# Altium PCB PCB1.PcbDoc
Units mm, origin at the board's own origin, x right, y up, seen from the top; angles counter-clockwise.
Board outline 100 x 80 mm, 2 copper layers (Top Layer, Bottom Layer); 65 components, 72 nets, 305 pads, 35 vias.
Unrouted connection lines stored in the file: 27.
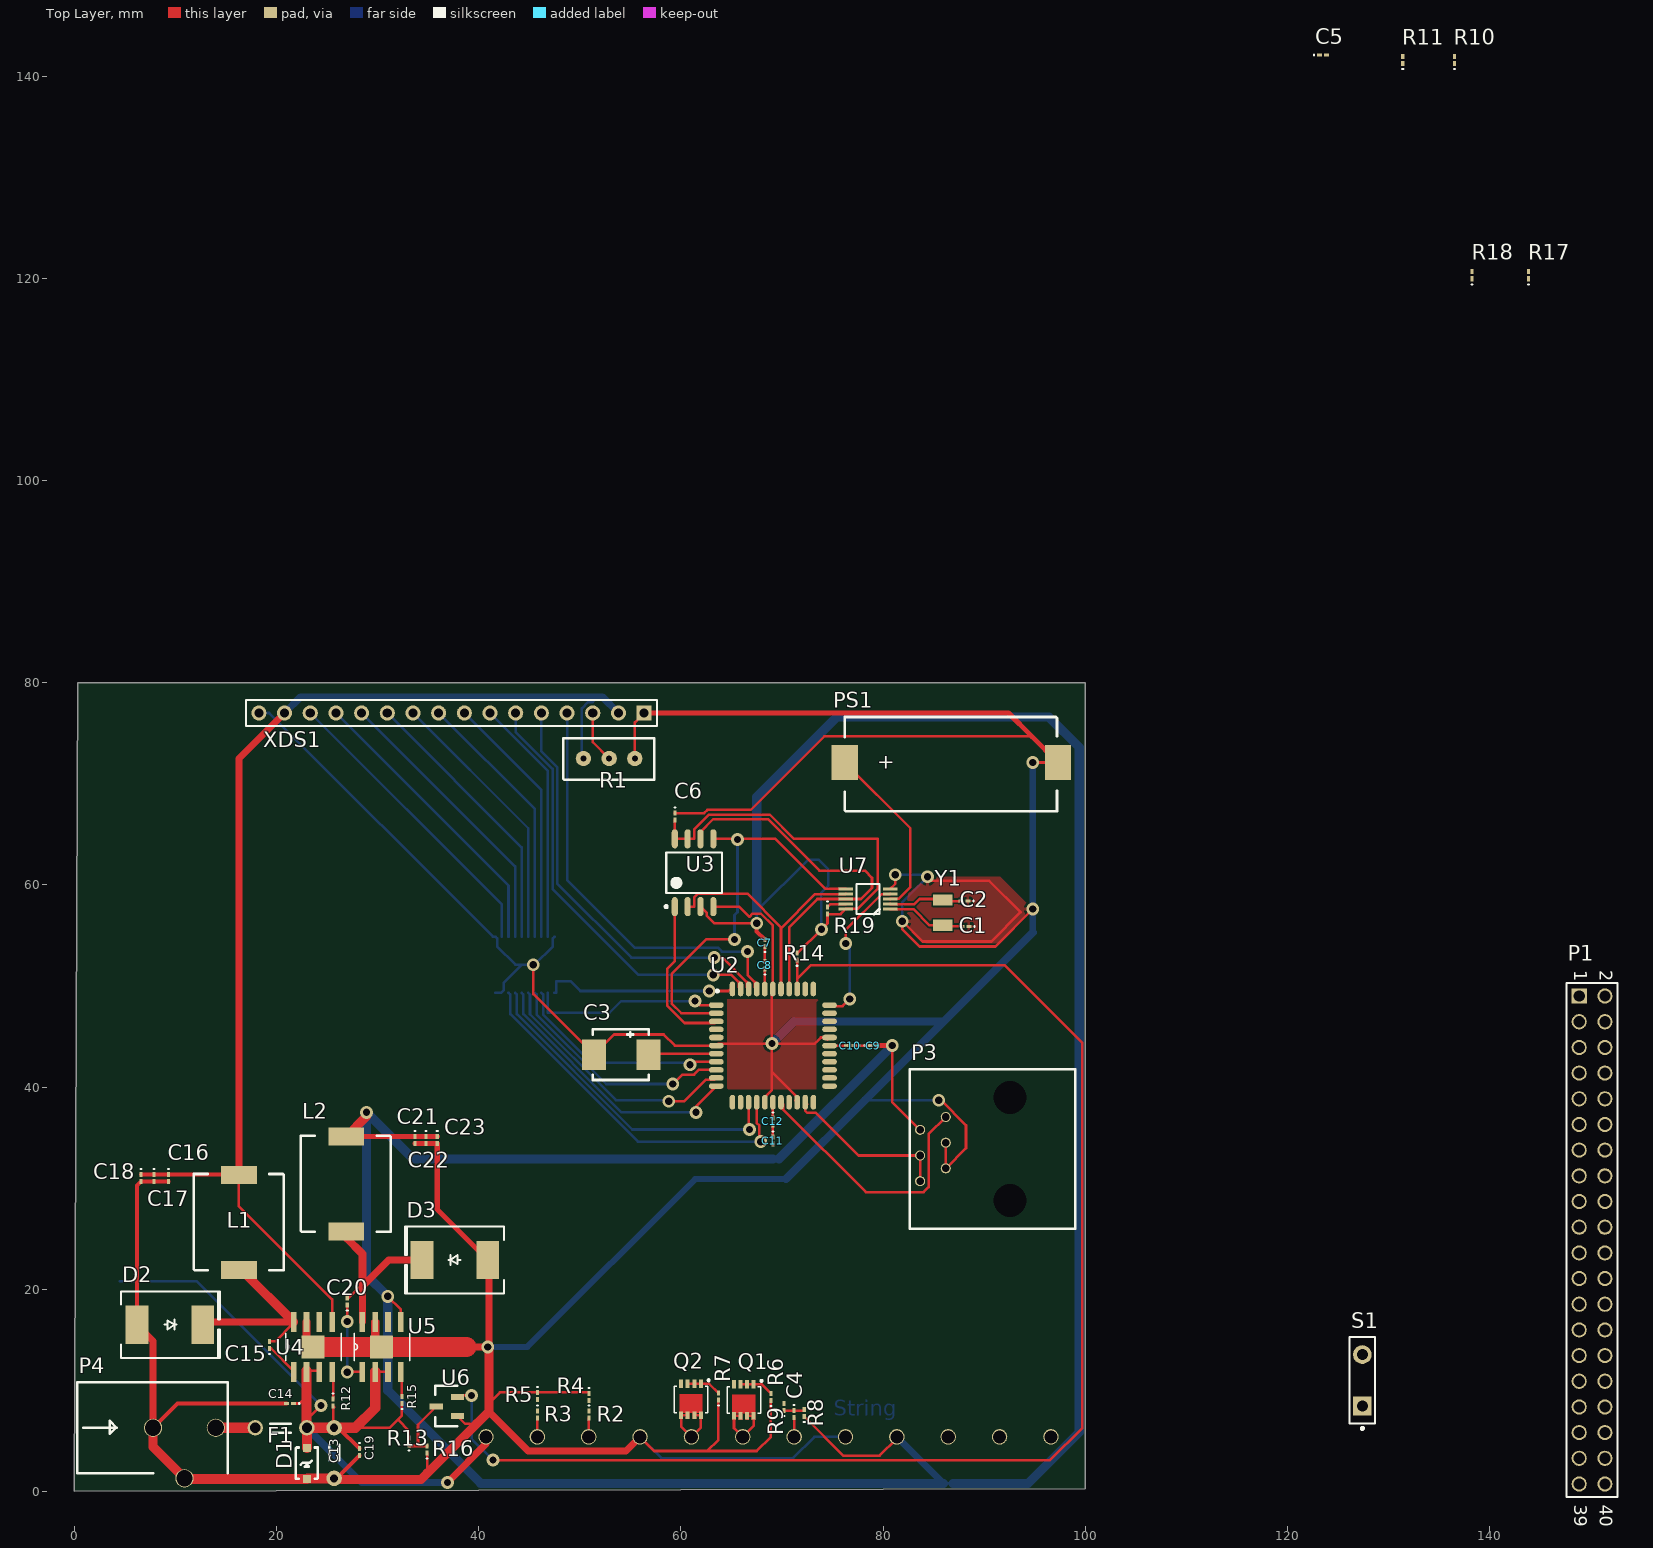
[diagram p0: Top Layer view]
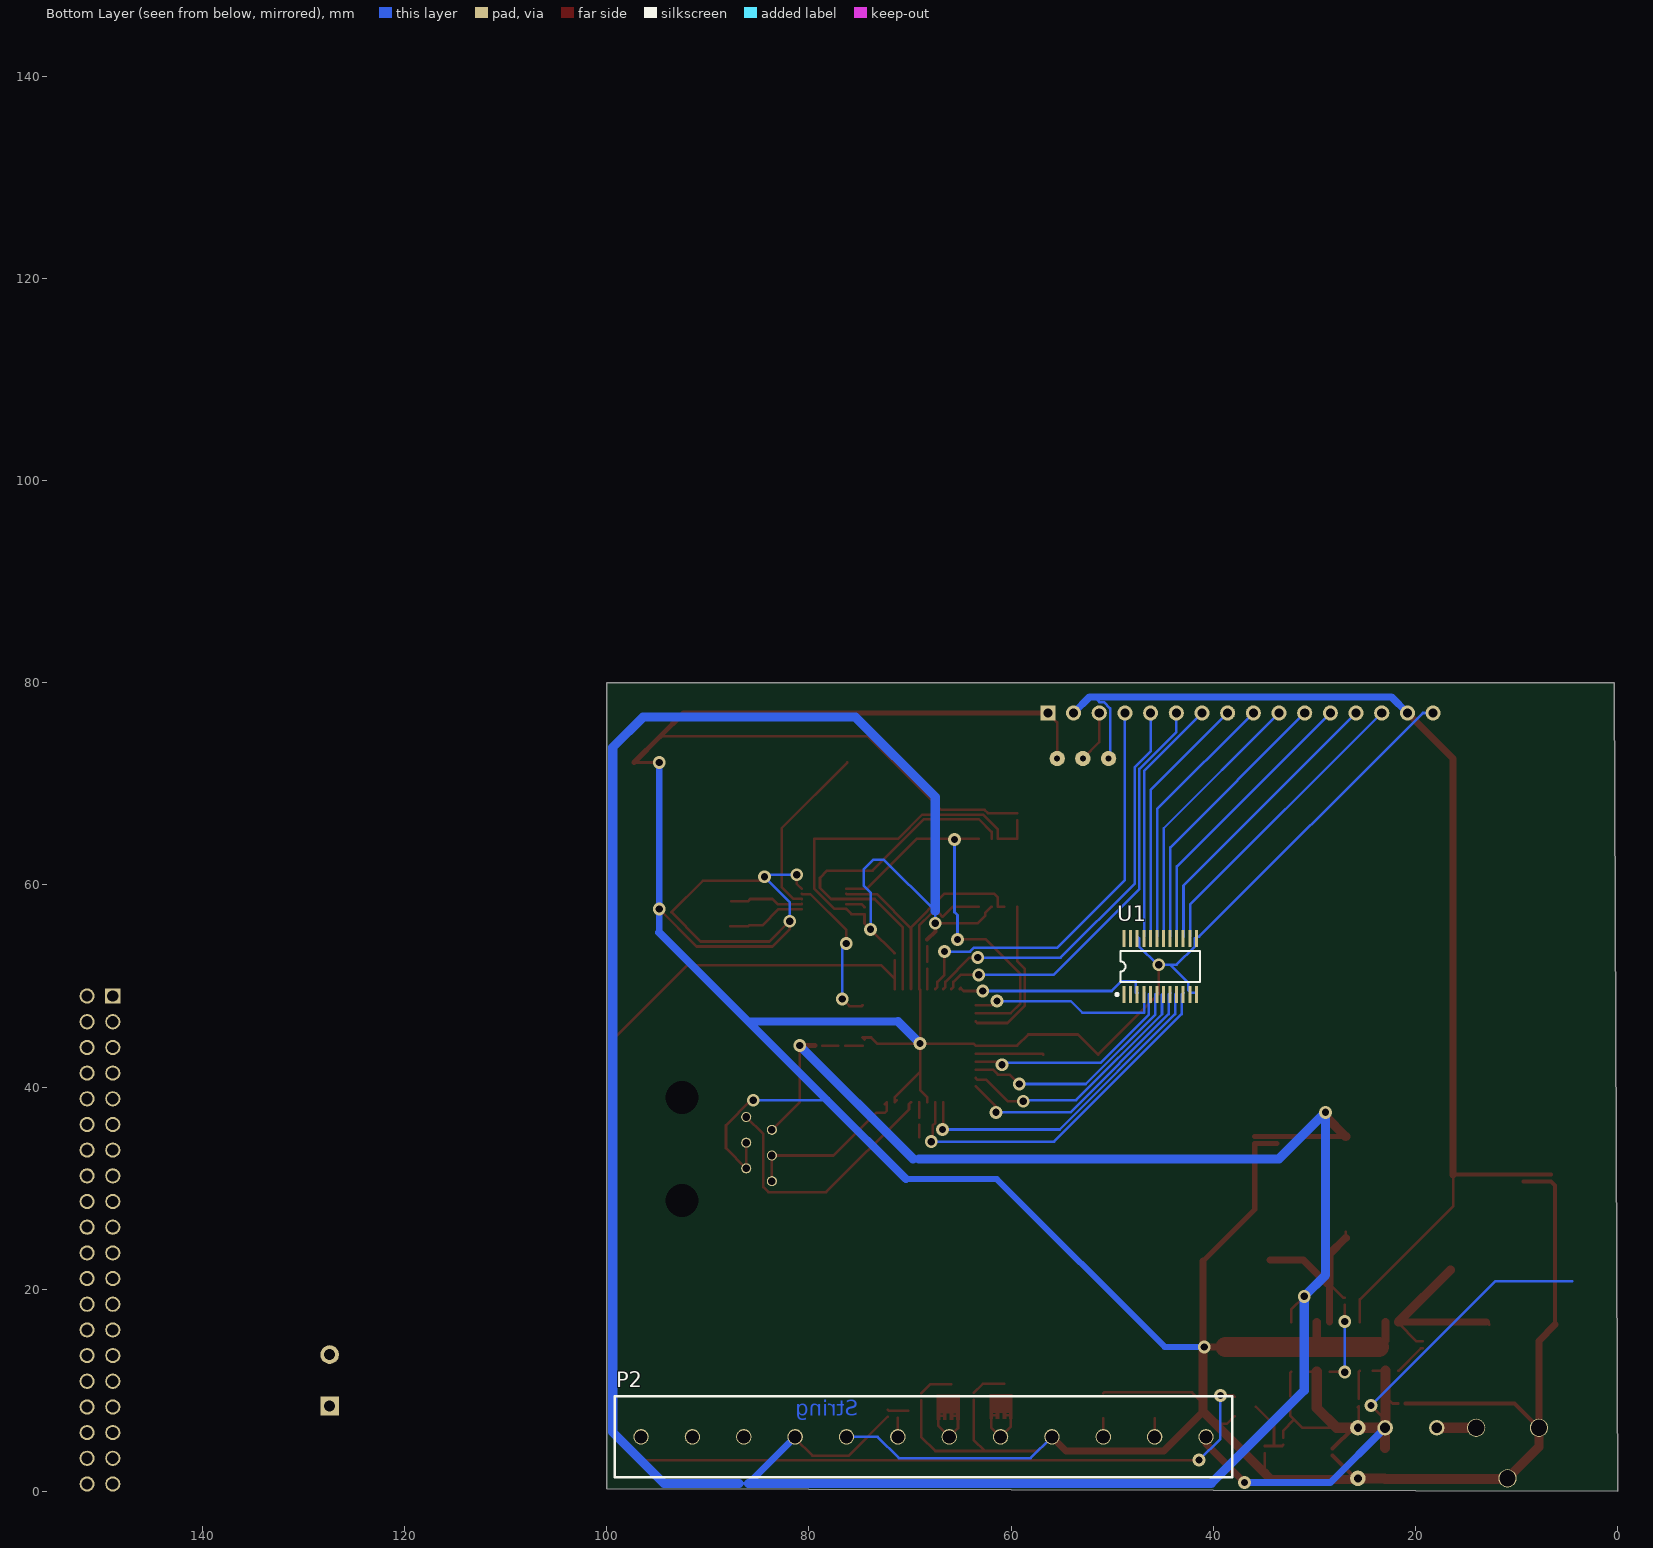
[diagram p1: Bottom Layer view, seen from below]

## Layer stack, top to bottom
Top Solder: solder mask 0.0102, Solder Resist, Dk 3.5
Top Layer: signal copper 0.0356
Dielectric 1: dielectric 0.32, FR-4, Dk 4.8
Bottom Layer: signal copper 0.0356
Bottom Solder: solder mask 0.0102, Solder Resist, Dk 3.5

## Board outline
0,0 100,0.262 100,80 0.338,80

## Design rules (kind name [scope] priority, off if disabled: settings)
Clearance [All] p1: gap=0.2 ignorepadtopadclearanceinfootprint=FALSE
HoleSize [All] p1: absolutevalues=TRUE maxlimit=5 minlimit=0.3 maxpercent=80.000 minpercent=20.000
PolygonConnect [All] p1: connectstyle=Relief reliefconductorwidth=0.254 reliefentries=4 polygonreliefangle="90 Angle" airgapwidth=0.254
RoomDefinition Ecran [InComponentClass('Ecran')] p1: confinementstyle=ConfineIn formatcopy=TRUE lockcomponents=FALSE outline 101.2,15.2 122.6,15.2 122.6,58.9 101.2,58.9
RoutingVias [All] p1: holewidth=0.711 width=1.27 viastyle="Through Hole" minholewidth=0.711 minwidth=1.27 maxholewidth=0.711 maxwidth=1.27
SilkToSolderMaskClearance [IsPad] p1: minsilkscreentomaskgap=0.2 clearancetoexposedcopper=TRUE
SolderMaskExpansion [All] p1: expansion=0.102
Width [All] p1: maxlimit=5 minlimit=0.2 preferedwidth=0.254
28 further rules are at their usual default settings.

## Classes and differential pairs
net class S_D[0..7]: S_D0 S_D1 S_D2 S_D3 S_D4 S_D5 S_D6 S_D7
net class RG_LED_[0..1]: RG_LED_0 RG_LED_1
component class Power: C7 C8 C9 C10 C11 C12 C13 C14 C15 C16 C17 C18 C19 C20 C21 C22 C23 D1 D2 D3 F1 L1 L2 P4 PS1 R12 R13 R14 R15 R16 U4 U5 U6
component class PIC: C1 C2 C3 C4 C5 C6 P3 R8 R9 R10 R11 R19 U2 U3 U7 Y1
component class OTHER: P1 Q1 Q2 R2 R3 R4 R5 R6 R7 R17 R18
component class Ecran: R1 U1 XDS1
component class Designator: * B1 D4 DS1 MCL039PURGW P5 S1

## Components (designator, comment, footprint, x,y, rotation, side; value= is the part's Value field where it differs from the comment)
C1 "18pF" 0603 88.15,55.9 r180 top
C2 "18pF" 0603 88.05,58.4 r180 top
C3 "10uF" C3 56.8,43.2 r180 top
C4 "100nF" 0603 71.2,7.65 r270 top
C5 "0.1uF" 0603 123.5,142.1 r0 top
C6 "22uF" 0603 59.4,66.75 r270 top
C7 "0.1uF" 0603 68.3,54.25 r90 top
C8 "0.1uF" 0603 68.3,52.05 r90 top
C9 "0.1uF" 0603 79.05,44.1 r0 top
C10 "0.1uF" 0603 76.75,44.1 r180 top
C11 "0.1uF" 0603 69.1,34.7 r270 top
C12 "0.1uF" 0603 69.1,36.6 r270 top
C13 "1000uF" Condo_trav 25.7,1.3 r90 top
C14 "10uF" 0603 21.35,8.7 r180 top
C15 "0.1uF" 0603 19.3,14.5 r90 top value=0.1000000001uF
C16 "22uF" 0603 9.3,31 r270 top
C17 "22uF" 0603 7.9,31 r270 top
C18 "22uF" 0603 6.6,31 r270 top
C19 "10uF" 0603 28.2,3.9 r270 top
C20 "0.1uF" 0603 27,18.8 r90 top value=0.10uF
C21 "22uF" 0603 33.7,34.75 r270 top
C22 "22uF" 0603 34.8,34.75 r270 top
C23 "22uF" 0603 35.9,34.75 r270 top
D1 "Diode 10TQ035" DiodeZin 23,1.25 r90 top
D2 "MBRS330T3G" "DO214AB SMC" 6.2,16.5 r0 top
D3 "MBRS330T3G" "DO214AB SMC" 40.9,22.9 r180 top
F1 "Fuse 1" FUSIBLE 17.9,6.3 r0 top
L1 "7uH" L1L2 16.3,21.9 r180 top
L2 "7uH" L1L2 26.9,25.7 r180 top
P1 "61304021121" Connect2x20 148.85,49 r270 top
P2 "31101112" Bornier12 96.6,5.4 r180 bottom
P3 "90512-001LF" RJ12 92.55,38.95 r270 top
P4 "FC681465P" JackAlim 7.8,6.3 r0 top
PS1 "Support Pile" Pile 76.2,72.1 r0 top
Q1 "MOSFET-N" MOSFETN 66.225,9.045 r270 top
Q2 "MOSFET-N" MOSFETN 61,9.1 r270 top
R1 "20k" POTARD 50.36,72.5 r0 top
R2 "300k" 0603 50.9,7.6 r270 top
R3 "300k" 0603 45.8,7.6 r270 top
R4 "100k" 0603 50.9,9.35 r270 top
R5 "100k" 0603 45.8,9.45 r270 top
R6 "300k" 0603 68.9,9.35 r90 top
R7 "300k" 0603 63.7,9.4 r90 top
R8 "10K" 0603 72.2,7.75 r90 top
R9 "330" 0603 70.2,8.35 r90 top
R10 "10K" 0603 136.5,141.6 r90 top value=10k
R11 "1Ko" 0603 131.4,141.6 r90 top value=1K
R12 "100ko" 0603 25.6,8.8 r270 top
R13 "300k" 0603 33.1,4.95 r90 top
R14 "330" 0603 71.5,52.9 r90 top
R15 "100ko" 0603 32.4,9.05 r90 top
R16 "100k" 0603 34.9,4.15 r90 top
R17 "60.4" 0603 143.85,120.3 r90 top value=60.4o
R18 "75" 0603 138.25,120.3 r90 top value=75o
R19 "330" 0603 74.5,57.45 r270 top
S1 "Bouton Status" SPST-2 127.4,11 r90 top
U1 "74LVX4245MTCX" TRANS 45.25,51.925 r180 bottom
U2 "PIC32MX110F016D-I/PT" TQFP-44_L 69.1,44.1 r0 top
U3 "SST25VF016B-50-4C-S2AF-T" SOIC208-8_L 61.3,61.2 r90 top
U4 "ADP2302ARDZ-5.0-R7" converts 23.6,14.3 r90 top
U5 "ADP2302ARDZ-3.3-R7" converts 30.4,14.3 r90 top
U6 "LM809M3-3.08/NOPB" LM809 37.9,7.45 r180 top
U7 "MCP79510-I/MS" rtc 78.5,58.6 r180 top
XDS1 "1-826629-6" HDR1X16 56.36,77 r180 top
Y1 "32.768kHz" QUARTZ32KHz 85.9,57.25 r90 top

## Footprints (in the part's own frame and the unit in brackets; to place one, negate y for a bottom-side part, rotate by r counter-clockwise, add the part's x,y. Pads: shape width x height; smd on the part's side, far side on the other; paste and mask are expansions set on the pad)
0603 [mm] "Chip Inductor, Body 0.6x0.3mm, IPC High Density"
  rect 0.5x0.3 smd: 1(-0.35,0) 2(0.35,0)
  silkscreen extent -0.9,-0.05 -0.9,0.05, body extent -0.33,-0.18 0.33,0.18, height 0.55
Bornier12 [mil]
  round 60 hole 51.18: 1(0,0) 2(200,0) 3(400,0) 4(600,0) 5(800,0) 6(1000,0) 7(1200,0) 8(1400,0) 9(1600,0) 10(1800,0) 11(2000,0) 12(2200,0)
  silkscreen extent -102,-157 2302,157
C3 [mm]
  rect 2.4x3 smd: 1(0,0) 2(5.4,0)
  silkscreen extent 0,-2.5 5.5,2.5
Condo_trav [mil]
  round 60 hole 31.5: 1(0,0) 2(196.85,0)
  silkscreen extent 71,-20 130,20
Connect2x20 [mm] "Connector; Header; 20x2 Position"
  rect 1.5x1.5 hole 1.1: 1(0,0)
  round 1.5 hole 1.1: 2(0,2.54) 3(2.54,0) 4(2.54,2.54) 5(5.08,0) 6(5.08,2.54) 7(7.62,0) 8(7.62,2.54) 9(10.16,0) 10(10.16,2.54) 11(12.7,0) 12(12.7,2.54) 13(15.24,0) 14(15.24,2.54) 15(17.78,0) 16(17.78,2.54) 17(20.32,0) 18(20.32,2.54) 19(22.86,0) 20(22.86,2.54) 21(25.4,0) 22(25.4,2.54) 23(27.94,0) 24(27.94,2.54) 25(30.48,0) 26(30.48,2.54) 27(33.02,0) 28(33.02,2.54) 29(35.56,0) 30(35.56,2.54) 31(38.1,0) 32(38.1,2.54) 33(40.64,0) 34(40.64,2.54) 35(43.18,0) 36(43.18,2.54) 37(45.72,0) 38(45.72,2.54) 39(48.26,0) 40(48.26,2.54)
  silkscreen extent -1.27,-1.27 49.53,3.81
converts [mil]
  rect 78x22 smd: 1(-97,75) 2(-97,25) 3(-97,-25) 4(-97,-75) 5(97,-75) 6(97,-25) 7(97,25) 8(97,75)
  rect 90x90 smd: 9(0,0)
  silkscreen extent -54,-110 54,106
DiodeZin [mm]
  rect 0.8x0.8 smd: 1(3.05,0) 3(0,0)
  silkscreen extent 0,-1.1 3.1,1.1
"DO214AB SMC" [mm] "Molded Diode, 2-Leads, Body 6.85x5.90mm, IPC Medium Density"
  rect 2.25x3.79 smd: 1(0,0) 2(6.5,0)
  silkscreen extent -1.6,-3.3 8.2,3.3, body extent -0.67,-2.95 7.27,2.95, height 2.6
FUSIBLE [mil]
  round 60 hole 39.37: 1(0,0) 2(200.79,0)
  silkscreen extent 59,-20 138,16
HDR1X16 [mm] "Connector; Header; 16 Position"
  rect 1.5x1.5 hole 0.9: 1(0,0)
  round 1.5 hole 0.9: 2(2.54,0) 3(5.08,0) 4(7.62,0) 5(10.16,0) 6(12.7,0) 7(15.24,0) 8(17.78,0) 9(20.32,0) 10(22.86,0) 11(25.4,0) 12(27.94,0) 13(30.48,0) 14(33.02,0) 15(35.56,0) 16(38.1,0)
  silkscreen extent -1.27,-1.27 39.37,1.27
JackAlim [mm]
  round 1.8 hole 1.6: 1(6.2,0) 2(3.1,-5) 3(0,0)
  silkscreen extent -7.5,-4.5 7.4,4.5
L1L2 [mm]
  rect 3.56x1.78 smd: 1(0,0) 2(0,-9.4)
  silkscreen extent -4.4,-9.5 4.5,0
LM809 [mm]
  rect 1.3x0.6 smd: 1(0,0) 2(0,-1.9) 3(2.1,-0.95)
  silkscreen extent 0,-3 2.2,1
MOSFETN [mm]
  rect 0.75x0.4 smd: 1(1.555,0.975) 1(1.555,-0.325) 1(1.555,0.325) 1(1.555,-0.975)
  rect 0.83x0.4 smd: 2(-1.555,-0.975) 3(-1.555,0.975) 3(-1.555,-0.325) 3(-1.555,0.325)
  Top Layer region: -0.54,1.125 1.93,1.125 1.93,0.795 1.31,0.795 1.31,0.505 1.93,0.505 1.93,0.165 1.31,0.165 1.31,-0.165 1.93,-0.165 1.93,-0.515 1.31,-0.515 1.31,-0.805 1.93,-0.805 1.93,-1.125 -0.54,-1.125
  silkscreen extent -2,-1.66 1.3,1.85
Pile [mm]
  rect 2.6x3.5 smd: 1(0,0) 2(21.1,0)
  silkscreen extent 0,-4.8 21,4.5
POTARD [mil]
  round 60 hole 23.62: 1(0,0) 2(100,0) 3(200,0)
  silkscreen extent -79,-83 276,79
QUARTZ32KHz [mm]
  rect 1.1x1.9 smd: 1(-1.25,0) 2(1.25,0)
RJ12 [mm]
  round 1.524 hole 3.25 unplated: 0(0,0) 0(10.16,0)
  round 1 hole 0.762: 1(1.91,-6.35) 2(3.18,-8.89) 3(4.45,-6.35) 3(6.99,-6.35) 4(5.72,-8.89) 4(8.26,-8.89)
  silkscreen extent -2.8,-9.91 12.96,6.47
rtc [mm]
  rect 1.4x0.3 smd: 1(-2.2,1) 2(-2.2,0.5) 3(-2.2,0) 4(-2.2,-0.5) 5(-2.2,-1) 6(2.2,-1) 7(2.2,-0.5) 8(2.2,0) 9(2.2,0.5) 10(2.2,1)
  silkscreen extent -1.15,-1.5 1.15,1.5
SOIC208-8_L [mm] "8-Pin Plastic Medium Body Small Outline Package 1.27 mm Pitch, IPC High Density"
  oval 1.9x0.6 smd: 1(-3.35,1.905) 2(-3.35,0.635) 3(-3.35,-0.635) 4(-3.35,-1.905) 5(3.35,-1.905) 6(3.35,-0.635) 7(3.35,0.635) 8(3.35,1.905)
  silkscreen extent -3.47,-2.75 2,2.88, body extent -2.73,-2.75 2.73,2.75, height 2.04
SPST-2 [mm] "Switch; 2 Leads"
  rect 1.85x1.85 hole 1.1: 1(-2.54,0)
  round 1.85 hole 1.1: 2(2.54,0)
  silkscreen extent -4.89,-1.27 4.28,1.27
TQFP-44_L [mm] "44-Pin Thin Quad Flat Pack 0.8 mm Pitch, 1.0/0.1 mm Lead Form, IPC High Density"
  oval 1.45x0.55 smd: 1(-5.6,4) 2(-5.6,3.2) 3(-5.6,2.4) 4(-5.6,1.6) 5(-5.6,0.8) 6(-5.6,0) 7(-5.6,-0.8) 8(-5.6,-1.6) 9(-5.6,-2.4) 10(-5.6,-3.2) 11(-5.6,-4) 23(5.6,-4) 24(5.6,-3.2) 25(5.6,-2.4) 26(5.6,-1.6) 27(5.6,-0.8) 28(5.6,0) 29(5.6,0.8) 30(5.6,1.6) 31(5.6,2.4) 32(5.6,3.2) 33(5.6,4)
  oval 0.55x1.45 smd: 12(-4,-5.6) 13(-3.2,-5.6) 14(-2.4,-5.6) 15(-1.6,-5.6) 16(-0.8,-5.6) 17(0,-5.6) 18(0.8,-5.6) 19(1.6,-5.6) 20(2.4,-5.6) 21(3.2,-5.6) 22(4,-5.6) 34(4,5.6) 35(3.2,5.6) 36(2.4,5.6) 37(1.6,5.6) 38(0.8,5.6) 39(0,5.6) 40(-0.8,5.6) 41(-1.6,5.6) 42(-2.4,5.6) 43(-3.2,5.6) 44(-4,5.6)
  silkscreen extent -5.62,5.28 -5.37,5.52
TRANS [mm] "Shrink Small Outline; 24 Leads; Body Width 4.4 mm; Pitch 0.65 mm"
  rect 0.3x1.65 smd: 1(-3.575,-2.775) 2(-2.925,-2.775) 3(-2.275,-2.775) 4(-1.625,-2.775) 5(-0.975,-2.775) 6(-0.325,-2.775) 7(0.325,-2.775) 8(0.975,-2.775) 9(1.625,-2.775) 10(2.275,-2.775) 11(2.925,-2.775) 12(3.575,-2.775) 13(3.575,2.775) 14(2.925,2.775) 15(2.275,2.775) 16(1.625,2.775) 17(0.975,2.775) 18(0.325,2.775) 19(-0.325,2.775) 20(-0.975,2.775) 21(-1.625,2.775) 22(-2.275,2.775) 23(-2.925,2.775) 24(-3.575,2.775)
  silkscreen extent -4.4,-2.9 3.95,1.55

## Part data
C1 C2 C4 C5 C7 C8 C9 C10 C11 C12 C13: library part Cap, "Capacitor", Fournisseur=Farnell
  C1 C2: Fabricant=AVX, Ref.Fabricant=02013A180JAT2A, Ref.Fournisseur=1740563
  C4: Fabricant="WURTH ELECTRONIK", Ref.Fabricant=885342211005, Ref.Fournisseur=2812613
  C5 C7 C8 C9 C10 C11 C12: Fabricant=Multicomp, Ref.Fabricant=MCY4C3B104M160CT, Ref.Fournisseur=2310273
  C13: Fabricant=Multicomp, Ref.Fabricant=MCGLR16V108M10X16, Ref.Fournisseur=1902972
C3: library part "Cap Pol1", Fabricant=VISHAY, Fournisseur=Farnell, Ref.Fabricant=TL3C106K025C0450.., Ref.Fournisseur=2353238
C6 C16 C17 C18 C21 C22 C23: library part Cap, "Cout_Reg_3.3v", Fabricant=AVX, Fournisseur=Farnell, Ref.Fabricant=12103D226KAT2A, Ref.Fournisseur=1833829
C14: library part Cap, "Cin_Reg_5v", Fabricant=KEMET, Fournisseur=Farnell, Ref.Fabricant=C1210C106K3RACTU, Ref.Fournisseur=1358512
C15: library part Cap, "Cbst_Reg_5v", Fabricant=TDK, Fournisseur=Farnell, Ref.Fabricant=CGA2B3X7R1E104K050BB, Ref.Fournisseur=2210820
C19: library part Cap, "Cin_Reg_3v", Fabricant=KEMET, Fournisseur=Farnell, Ref.Fabricant=C1210C106K3RACTU, Ref.Fournisseur=1358512
C20: library part Cap, "Cbst_Reg_3.3v", Fabricant=TDK, Fournisseur=Farnell, Ref.Fabricant=CGA2B3X7R1E104K050BB, Ref.Fournisseur=2210820
D1: "Diode Zenner", Fabricant="ON SEMICONDUCTOR", Fournisseur=Farnell, Ref.Fabricant=MM3Z15VB, Ref.Fournisseur=2453991
D2 D3: library part Diode, "Schottky", Fabricant=OnSemiconductor, Fournisseur=Farnell, Ref.Fabricant=MBRS330T3G, Ref.Fournisseur=1459078
F1: "Fuse", Fabricant=Littelfuse, Fournisseur=Farnell, Ref.Fabricant=39515000000, Ref.Fournisseur=1596504
L1: library part Inductor, "L_Reg_5v", Fabricant=Coilcraft, Fournisseur=Farnell, Ref.Fabricant=MSS1038-702NLC, Ref.Fournisseur=2288224
L2: library part Inductor, "L_Reg_3.3v", Fabricant=Coilcraft, Fournisseur=Farnell, Ref.Fabricant=MSS1038-702NLC, Ref.Fournisseur=2288224
P1: library part "Header 20X2", "Header, 20-Pin, Dual row", Fabricant="WURTH ELECTRONIK", Fournisseur=Farnell, Ref.Fabricant=61304021121, Ref.Fournisseur=2356148
P2: library part "Header 12", "Header, 12-Pin", Fabricant="METZ CONNECT", Fournisseur=Farnell, Ref.Fabricant=31101112, Ref.Fournisseur=1909750
P3: library part "Header 6", "PortRJ12_debug", Fabricant="Amphenol ICC", Fournisseur=Farnell, Ref.Fabricant=90512-001LF, Ref.Fournisseur=1097914
P4: library part FC68148S, "Power connector", Fabricant=CLIFF, Fournisseur=Farnell, Ref.Fabricant=FC681465P, Ref.Fournisseur=1854512
PS1: library part SMTU-1225-1-LF, Fabricant=Renata, Fournisseur=Farnell, Ref.Fabricant=SMTU-1225-1-LF, Ref.Fournisseur=1216353
Q1 Q2: "N-Channel MOSFET", Fabricant=Nexperia, Fournisseur=Farnell, Ref.Fabricant=BUK7M42-60EX, Ref.Fournisseur=2760371
R1: library part RPot, "Potentiometer", Fabricant=VISHAY, Fournisseur=Farnell, Ref.Fabricant=M63S203KB40, Ref.Fournisseur=9609822
R2 R3 R4 R5 R6 R7 R8 R9 R10 R11 R12 R13 R14 R15 R16 R17 R18 R19: library part Res2, "Resistor", Fournisseur=Farnell
  R2 R3 R6 R7 R13: Fabricant=MULTICOMP, Ref.Fabricant=MCSR08X3003FTL, Ref.Fournisseur=2074433
  R4 R5 R16: Fabricant=MULTICOMP, Ref.Fabricant=MCWR06X1003FTL, Ref.Fournisseur=2447226
  R8 R10: Fabricant="TE CONNECTIVITY", Ref.Fabricant=CPF0201D10KC1, Ref.Fournisseur=2117887
  R9 R14 R19: Fabricant="TE Connectivity", Ref.Fabricant=RN73C1J232RBTDF, Ref.Fournisseur=2687973
  R11: Fabricant="TE CONNECTIVITY", Ref.Fabricant=CPF0201D1K0E1, Ref.Fournisseur=2117780
  R12 R15: Fabricant=Multicomp, Ref.Fabricant=MCWR06X1003FTL, Ref.Founisseur=2447226
  R17: Fabricant="TE CONNECTIVITY", Ref.Fabricant=RP73PF1E60R4BTDF, Ref.Fournisseur=2838800
  R18: Fabricant="TE CONNECTIVITY", Ref.Fabricant=CPF0805B75RE1, Ref.Fournisseur=1697415
S1: library part SW-PB, "Switch", Fabricant=RAFI, Fournisseur=Farnell, Ref.Fabricant=1.10.001.001/0205, Ref.Fournisseur=9927360
U1: "Bus Transceiver", Fabricant="ON SEMICONDUCTOR", Fournisseur=Farnell, Ref.Fabricant=74LVX4245MTCX, Ref.Fournisseur=1467357
U2: library part PIC32, Fabricant=MICROCHIP, Fournisseur=Farnell, Ref.Fabricant=PIC32MX110F016D-I/PT, Ref.Fournisseur=2057068
U3: library part Memoire, "FLASH", Fabricant=Microchip, Fournisseur=Farnell, Ref.Fabricant=SST25VF016B-50-4I-S2AF-T, Ref.Fournisseur=2774943
U4: "Convert. 5v", Fabricant="Analog Devices", Fournisseur=Farnell, Ref.Fabricant=ADP2302ARDZ-5.0-R7, Ref.Fournisseur=2727507
U5: "Convert.3.3", Fabricant="Analog Devices", Fournisseur=Farnell, Ref.Fabricant=ADP2302ARDZ-3.3-R7, Ref.Fournisseur=2376914
U6: "Voltage Monitor", Fabricant="TEXAS INSTRUMENTS", Fournisseur=Farnell, Ref.Fabricant=LM809M3-3.08/NOPB, Ref.Fournisseur=2352609
U7: library part MCP79510, "RTC", Fabricant=Microchip, Fournisseur=Farnell, Ref.Fabricant=MCP79510-I/MS, Ref.Fournisseur=2361124
XDS1: library part "Header 16", "Header, 16-Pin", Fabricant="AMP-TE CONNECTIVITY", Fournisseur=Farnell, Ref.Fabricant=1-826629-6, Ref.Fournisseur=1248124
Y1: library part XTAL, "Crystal Oscillator", Fabricant=ABRACON, Fournisseur=Farnell, Ref.Fabricant=ABS07-32.768KHZ-7-T, Ref.Fournisseur=1838935

## Via types
v1: diameter 1.27, hole 0.711, Top Layer to Bottom Layer, 35 vias

## Nets (pads, with @x,y where several pads share a name; then routed paths per layer and width w, separated by ;. In a path a pad name is that pad's centre, name@x,y a point inside that pad or via, vN(x,y) a via of type N, cw(c..) or ccw(c..) an arc to the next point about the centre after c; other vN are vias at no path point)
3.3VDC: C6.2 C7.2 C9.2 C11.2 C21.1 C22.1 C23.1 L2.2 P2.4 P3.2 R8.1 R10.2 R14.2 R19.2 U1.1 U3.3 U3.7 U3.8 U5.5 U7.10 | length 386.9
  Top Layer w0.254: v1@28.9,37.1 v1(28.9,37.5) ; v1(31,19.3) 32.305,17.995 U5.5 ; C6.2 59.395,66.395 U3.8 U3.7 61.308,64.55 61.308,65.46 62.802,66.954 68.788,66.954 71.192,64.55 79.45,64.55 79.45,59.608 77.465,57.623 76.323,57.623 U7.10 75.8,57.1 R19.2 74.5,56.2 v1(73.9,55.6) 71.55,53.25 R14.2 ; U3.3 62.578,57.207 62.578,56.94 63.318,56.2 v1(67.5,56.2) ; R8.1 76.046,3.554 79.654,3.554 81.36,5.26 P2.4 ; v1(80.9,44.1) 80.9,38.53 P3.2
  Top Layer w0.4: v1(67.5,56.2) 67.5,55.4 C7.2
  Top Layer w0.5: L2.2 C21.1 C22.1 C23.1 ; C9.2 v1(80.9,44.1)
  Top Layer w0.9: L2.2 v1@28.9,37.1
  Bottom Layer w0.254: v1(67.5,56.2) 67.5,57.4 72.6,62.5 73.624,62.5 74.562,61.562 74.562,59.902 73.9,59.24 v1(73.9,55.6) ; 69.1,32.9 69.7,32.9 ; 85.96,0.8 86.9,0.8
  Bottom Layer w0.7: P2.4 85.96,0.8
  Bottom Layer w0.9: 67.5,57.4 67.5,68.7 75.4,76.6 96.4,76.6 99.4,73.6 99.4,5.863 94.337,0.8 86.9,0.8 ; 69.1,32.9 33.5,32.9 v1(28.9,37.5) 28.9,21.4 v1(31,19.3) 31,10 40.2,0.8 85.96,0.8 ; 69.7,32.9 v1(80.9,44.1)
5VDC: C16.1 C17.1 C18.1 L1.2 P1.2 R1.1 U1.23 U1.24 U4.5 XDS1.2 XDS1.15 | length 117.1
  Top Layer w0.254: L1.2@16.25,31.35 16.25,28.25 25.505,18.995 U4.5
  Top Layer w0.4: C18.1 C17.1 C16.1 L1.2@16.25,31.35
  Top Layer w0.7: L1.2 16.3,72.5 XDS1.15
  Bottom Layer w0.254: R1.1 50.203,72.657 50.203,77.446 50.834,78.077 51.277,78.077 51.8,78.6
  Bottom Layer w0.7: XDS1.15 22.4,78.6 51.8,78.6 52.22,78.6 XDS1.2
12VDC: C13.2 C14.1 C19.1 D1.1 F1.2 P2.12 R12.2 R13.2 R15.1 U4.2 U4.3 U5.2 U5.3 | length 86.7
  Top Layer w0.254: C14.1 22.265,8.7 22.965,9.4 ; F1.2@22.965,6.335 F1.2 23,7.1 v1(24.4,8.5) ; U4.2@22.965,11.938 U4.3@24.235,11.938 ; R12.2@25.7,8.35 R12.2 25.6,6.4 C13.2 C13.2@26.15,6.3 ; 27.8,6.3 31.2,6.3 32,7.1 ; U5.2 U5.3 ; R15.1 32.4,7.5 32,7.1 ; R13.2 33.1,6 32,7.1 ; P2.12@40.72,4.72 P2.12
  Top Layer w0.4: C13.2@26.15,6.3 C19.1
  Top Layer w0.7: v1(36.9,0.9) P2.12@40.72,4.72
  Top Layer w1: F1.2@22.965,6.335 22.965,9.4 U4.2 U4.2@22.965,11.938 ; D1.1 F1.2 C13.2 ; C13.2@26.15,6.3 27.8,6.3 29.765,8.265 U5.2
  Bottom Layer w0.254: 4.5,20.78 12.12,20.78 v1(24.4,8.5)
  Bottom Layer w0.7: F1.2 28.4,0.9 v1(36.9,0.9)
Cmd_servo: P2.3 U2.23
CR_DATA0_3V: R2.1 R4.2 U2.13
CR_DATA0_12V: P2.10 R2.2 | length 1.9
  Top Layer w0.254: P2.10 50.88,7.23 R2.2
CR_DATA1_3V: R3.1 R5.2 U2.32
CR_DATA1_12V: P2.11 R3.2 | length 1.8
  Top Layer w0.254: P2.11 R3.2
CR_LED_G: Q2.2 U2.12
CR_LED_G_CTRL: P2.8 Q2.1 | length 6.4
  Top Layer w0.254: Q2.1@60.675,7.545 60.025,7.545 60.025,6.415 P2.8 61.975,6.335 61.975,7.545 Q2.1@61.325,7.545
CR_LED_R: Q1.2 U2.35
CR_LED_R_CTRL: P2.7 Q1.1 | length 6.3
  Top Layer w0.254: Q1.1@65.9,7.49 65.25,7.49 65.25,6.27 P2.7 67.2,6.48 67.2,7.49 Q1.1@66.55,7.49
FLSH_CE: U2.3 U3.1 | length 15.7
  Top Layer w0.254: U3.1 59.395,52.455 58.638,51.698 58.638,48.062 60.362,46.338 63.338,46.338 U2.3
GND: C1.1 C2.1 C3.2 C5.1 C6.1 C13.1 C14.2 C16.2 C17.2 C18.2 C19.2 C21.2 C22.2 C23.2 D1.3 D2.1 D3.1 P1.6 P2.5 P2.9 P3.3 P4.2 P4.3 PS1.2 R1.3 R4.1 R5.1 R6.1 R7.1 R16.1 S1.2 U1.11 U1.12 U1.13 U1.22 U2.6 U2.16 U2.20 U2.29 U2.39 U3.4 U4.7 U4.9 U5.7 U5.9 U6.1 U7.5 XDS1.1 XDS1.16 | length 590.8
  Top Layer w0.254: P4.2 P4.2@10.95,1.25 ; U4.9@22.965,14.935 U4.9 ; D1.3 D1.3@23.05,1.3 ; C13.1 C13.1@25.95,1.3 ; U5.9@29.765,14.935 U5.9 ; 34.9,1.8 R16.1 ; U6.1 38.65,6.7 39.8,6.7 ; v1(40.9,14.3) v1@41,14.4 ; D3.1 D3.1@41,22.8 ; 41,8.7 42.1,9.8 R5.1 50.8,9.8 R4.1 ; v1(45.4,52.1) 45.4,49.2 C3.2 53.4,45.2 58.3,45.2 59.4,44.1 U2.6 63.698,44.298 68.998,44.298 v1(69,44.3) ; R1.3 55.44,76.08 XDS1.1 ; P2.9 57.36,4 62.6,4 ; C6.1 62.306,67.1 62.614,67.408 66.908,67.408 74.2,74.7 94.7,74.7 ; U3.4 65.75,57.85 66.77,56.83 67.102,57.162 67.898,57.162 69.1,55.96 U2.39 69,49.6 v1(69,44.3) ; R7.1 63.7,5.1 62.6,4 ; U2.16 68.3,39.001 69,39.701 69,41.501 ; R6.1 68.9,5.4 67.5,4 62.6,4 ; U2.20@71.302,38.698 U2.20 71.5,39.001 69,41.501 ; U2.29@74.502,44.702 U2.29 73.846,44.9 73.246,44.3 v1(69,44.3) ; U7.5 81.2,60.1 v1(81.2,61) ; v1(84.4,60.8) 84.8,60.4 90.5,60.4 93.6,57.3 90.7,54.4 83.9,54.4 v1(81.9,56.4) 81.9,55.6 83.6,53.9 91.1,53.9 v1(94.8,57.6) ; v1(85.5,38.7) 85.71,38.7 88.2,36.21 88.2,33.96 86.2,31.96 P3.3@86.2,34.5 ; v1(94.8,72.1) PS1.2 ; 69,41.501 v1(69,44.3)
  Top Layer w0.4: D2.1 6.2,30.25 C18.2 C17.2 C16.2 ; P4.3 10.2,8.7 C14.2 ; C13.1@25.95,1.3 C19.2
  Top Layer w0.5: C21.2 C22.2 C23.2 35.9,27.9 D3.1 ; XDS1.1 92.4,77 94.7,74.7 PS1.2
  Top Layer w0.7: D2.1 7.8,14.9 P4.3 ; 38.8,14.3 v1(40.9,14.3) ; 41,7.9 44.9,4 54.56,4 P2.9 ; v1@41,14.4 D3.1@41,22.8
  Top Layer w0.8: U4.9@22.965,14.935 U4.7 ; U5.9@29.765,14.935 U5.7
  Top Layer w0.9: P4.3 7.8,4.4 P4.2 ; C13.1@25.8,1.2 34.3,1.2 34.9,1.8 39.8,6.7 41,7.9 41,8.7 v1@41,14.4
  Top Layer w1: P4.2@10.95,1.25 D1.3 ; D1.3@23.05,1.3 C13.1
  Top Layer w2: U4.9 U5.9 38.8,14.3
  Bottom Layer w0.254: XDS1.16 19.277,77 41.402,54.875 41.65,54.875 41.823,54.702 41.823,53.915 43.638,52.1 44.288,52.1 ; U1.12@41.65,49.325 42.225,49.325 42.473,49.573 42.473,50.285 44.288,52.1 ; U1.22@47.5,54.875 47.327,54.702 47.327,53.915 45.512,52.1 v1(45.4,52.1) 44.288,52.1 ; P2.9 58.06,3.3 71.1,3.3 73.2,5.4 P2.5 ; v1@69,44 v1(69,44.3) ; 78.2,38.7 v1(85.5,38.7) ; v1(81.2,61) 84.2,61 v1(84.4,60.8) 81.9,58.3 v1(81.9,56.4)
  Bottom Layer w0.6: v1(40.9,14.3) 44.8,14.3 61.4,30.9 70.4,30.9 ; 94.8,55.3 v1(94.8,57.6) v1(94.8,72.1)
  Bottom Layer w0.8: 70.4,30.9 78.2,38.7 86,46.5 ; 71.2,46.5 86,46.5 ; 94.8,55.3 86,46.5
  Bottom Layer w0.9: v1(69,44.3) 71.2,46.5
MCLR: P3.1 R11.2 U2.18 | length 26.4
  Top Layer w0.254: U2.18 70.098,38.302 70.098,37.801 78.299,29.6 84,29.6 84.5,30.1 84.5,35.34 P3.1
NetC3_1: C3.1 U2.7 | length 6.7
  Top Layer w0.254: C3.1 56.9,43.3 U2.7
NetC4_1: C4.1 R8.2 R9.1 | length 2
  Top Layer w0.254: R9.1 C4.1 72.1,8 R8.2
NetC4_2: C4.2 P2.6 | length 1.9
  Top Layer w0.254: P2.6 C4.2
NetC5_2: C5.2 R10.1 R11.1
NetC7_1: C7.1 C8.2 | length 1.5
  Top Layer w0.254: C8.2 C7.1
NetC9_1: C9.1 C10.1 | length 1.6
  Top Layer w0.254: C10.1 C9.1
NetC11_1: C11.1 C12.2 | length 1.2
  Top Layer w0.254: C11.1 C12.2
NetC15_1: C15.1 U4.1 | length 3.3
  Top Layer w0.254: C15.1 19.483,14.15 U4.1@21.695,11.938
NetC15_2: C15.2 D2.2 L1.1 U4.8 | length 19.8
  Top Layer w0.254: D2.2 D2.2@12.964,16.764 ; L1.1 L1.1@16.559,21.9 ; C15.2 19.883,14.85 U4.8@21.695,16.662
  Top Layer w0.7: D2.2@12.964,16.764 U4.8
  Top Layer w0.9: L1.1@16.559,21.9 U4.8
NetC20_1: C20.1 U5.1 | length 8.2
  Top Layer w0.254: v1(27,11.8) 27.036,11.836 U5.1 ; v1(27,16.8) C20.1
  Bottom Layer w0.254: v1(27,11.8) v1(27,16.8)
NetC20_2: C20.2 D3.2 L2.1 U5.8 | length 18.6
  Top Layer w0.254: L2.1@26.9,25.09 L2.1 ; C20.2 27.145,19.15 28.495,20.5 28.7,20.5
  Top Layer w0.7: U5.8 28.495,20.5 ; 28.7,20.5 31.1,22.9 D3.2
  Top Layer w0.8: L2.1@26.9,25.09 28.495,23.495 28.495,20.5
NetF1_1: F1.1 P4.1 | length 3.9
  Top Layer w1: P4.1 F1.1
NetQ1_3: Q1.3 R6.2 | length 3.4
  Top Layer w0.254: Q1.3@65.9,10.6 66.55,10.6 67.2,10.6 68,10.6 R6.2
NetQ2_3: Q2.3 R7.2 | length 3.4
  Top Layer w0.254: Q2.3@60.675,10.655 61.325,10.655 61.975,10.655 62.795,10.655 R7.2
NetR12_1: R12.1 U4.4 | length 2.8
  Top Layer w0.254: U4.4@25.505,11.938 25.6,11.843 R12.1
NetR15_2: R15.2 U5.4 | length 2.5
  Top Layer w0.254: U5.4 32.4,11.741 R15.2
NetR19_1: R19.1 U7.9 | length 1.9
  Top Layer w0.254: R19.1 74.8,58.1 U7.9
PGEC1: U2.22
PGED1: P3.4 U2.21 | length 16.9
  Top Layer w0.254: U2.21@72.498,38.302 U2.21 72.3,37.646 72.498,37.448 73.352,37.448 77.57,33.23 83.66,33.23 P3.4@83.66,30.69
PIC_RASPI_RXD: P1.8 U2.25
PIC_RASPI_TXD: P1.10 U2.26
Pot_contraste: R1.2 XDS1.3 | length 5.8
  Top Layer w0.254: XDS1.3@51.72,76.56 XDS1.3 51.28,74.12 R1.2
PowerOK: R14.1 U2.36 U6.2 | length 142.2
  Top Layer w0.254: U6.2 38.05,9.5 v1(39.3,9.5) ; v1(41.4,3.1) 96.5,3.1 99.7,6.3 99.7,44.358 91.996,52.062 72.862,52.062 71.5,50.7 U2.36 R14.1
  Bottom Layer w0.254: v1(39.3,9.5) 39.3,5.2 v1(41.4,3.1)
RG_LED_0: P2.1 R17.2 U2.30
RG_LED_1: P2.2 R18.2 U2.31
RTC_CS: U2.33 U7.4 | length 15.2
  Top Layer w0.254: U2.33 74.8,48 76,48 v1(76.7,48.7) ; v1(76.3,54.2) 76.3,55.512 79.865,59.077 80.677,59.077 U7.4
  Bottom Layer w0.254: v1(76.3,54.2) 76.7,53.8 v1(76.7,48.7)
S_D0: U1.3 U2.44 | length 19.3
  Top Layer w0.254: v1(62.8,49.5) 64.7,49.5 65,49.8 U2.44
  Bottom Layer w0.254: U1.3@47.5,49.325 47.673,49.325 47.673,50.477 49.085,50.477 50.062,49.5 v1(62.8,49.5)
S_D1: U1.4 U2.1 | length 19.3
  Top Layer w0.254: v1(61.4,48.5) 61.8,48.1 U2.1
  Bottom Layer w0.254: U1.4@46.85,49.325 46.85,47.35 52.95,47.35 54.1,48.5 v1(61.4,48.5)
S_D2: U1.5 U2.8 | length 21.4
  Top Layer w0.254: v1(60.9,42.2) 61.2,42.5 U2.8
  Bottom Layer w0.254: U1.5@46.2,49.325 46.373,49.152 46.373,47.185 51.158,42.4 v1@60.9,42.4
S_D3: U1.6 U2.9 | length 23.2
  Top Layer w0.254: v1(59.2,40.3) 60.138,41.238 61.298,41.238 61.76,41.7 U2.9
  Bottom Layer w0.254: U1.6@45.55,49.325 45.723,49.152 45.723,47.193 52.616,40.3 v1@59,40.3
S_D4: U1.7 U2.10 | length 25.2
  Top Layer w0.254: v1(58.8,38.6) 60.346,38.6 62.448,40.702 63.302,40.702 U2.10
  Bottom Layer w0.254: U1.7@44.9,49.325 45.073,49.152 45.073,47.201 53.574,38.7 v1@58.9,38.7
S_D5: U1.8 U2.11 | length 26.7
  Top Layer w0.254: v1(61.5,37.5) 61.5,38.1 U2.11
  Bottom Layer w0.254: U1.8@44.25,49.325 44.423,49.152 44.423,47.209 54.132,37.5 v1(61.5,37.5)
S_D6: U1.9 U2.14 | length 32.7
  Top Layer w0.254: U2.14 66.7,35.9 v1(66.8,35.8)
  Bottom Layer w0.254: U1.9@43.6,49.325 43.773,49.152 43.773,47.217 55.19,35.8 v1(66.8,35.8)
S_D7: U1.10 U2.15 | length 36.4
  Top Layer w0.254: U2.15 67.5,36.46 67.762,36.198 67.762,34.738 v1(67.9,34.6)
  Bottom Layer w0.254: U1.10@42.95,49.325 43.123,49.152 43.123,47.225 55.748,34.6 v1(67.9,34.6) v1@68.1,34.6
S_E: U2.43 XDS1.6 | length 41.9
  Top Layer w0.254: v1(63.2,51.1) 65.001,51.1 65.702,50.399 65.702,49.898 U2.43
  Bottom Layer w0.254: XDS1.6 43.66,75.102 47.304,71.458 47.304,59.596 55.8,51.1 v1(63.2,51.1)
S_RS: U2.41 XDS1.4 | length 41.4
  Top Layer w0.254: v1(66.6,53.4) 66.6,51.101 67.302,50.399 67.302,49.898 U2.41
  Bottom Layer w0.254: XDS1.4 48.74,60.46 55.438,53.762 63.698,53.762 64.06,53.4 v1(66.6,53.4)
S_RW: U2.42 XDS1.5 | length 41.1
  Top Layer w0.254: v1(63.3,52.8) 64.101,52.8 66.502,50.399 66.502,49.898 U2.42
  Bottom Layer w0.254: XDS1.5 46.2,73.204 47.758,71.646 47.758,60.142 55.1,52.8 v1(63.3,52.8)
SPI_SCK: U2.37 U3.6 U7.8 | length 37.5
  Top Layer w0.254: U3.6 61.935,65.235 63.2,66.5 68.6,66.5 73.7,61.4 78.2,61.4 78.9,60.7 78.9,59.7 77.8,58.6 U7.8 73.5,58.6 70.7,55.8 U2.37
SPI_SI: U2.38 U3.2 U7.7 | length 25.6
  Top Layer w0.254: U3.2 61.308,57.85 61.308,58.76 61.675,59.127 66.576,59.127 69.9,55.803 69.9,55.7 ; U2.38 69.9,55.7 ; U7.7 76.277,59.077 73.277,59.077 69.9,55.7
SPI_SO: U2.2 U3.5 U7.6 | length 40.5
  Top Layer w0.254: U3.5 69.35,64.55 74.3,59.6 U7.6 ; U2.2 60.042,47.3 59.092,48.25 59.092,51.192 62.5,54.6 v1(65.3,54.6)
  Bottom Layer w0.254: v1(65.3,54.6) 65.3,57 65.6,57.3 v1(65.6,64.5)
STATUS_BTN: R9.2 U2.24
TS_D0: U1.21 XDS1.7 | length 24.5
  Bottom Layer w0.254: XDS1.7 46.85,71.27 U1.21@46.85,54.875
TS_D1: U1.20 XDS1.8 | length 25.3
  Bottom Layer w0.254: XDS1.8 46.2,69.38 U1.20@46.2,54.875
TS_D2: U1.19 XDS1.9 | length 26.1
  Bottom Layer w0.254: XDS1.9 45.55,67.49 U1.19@45.55,54.875
TS_D3: U1.18 XDS1.10 | length 26.8
  Bottom Layer w0.254: XDS1.10 44.9,65.6 U1.18@44.9,54.875
TS_D4: U1.17 XDS1.11 | length 27.6
  Bottom Layer w0.254: XDS1.11 44.25,63.71 U1.17@44.25,54.875
TS_D5: U1.16 XDS1.12 | length 28.4
  Bottom Layer w0.254: XDS1.12 43.6,61.82 U1.16@43.6,54.875
TS_D6: U1.15 XDS1.13 | length 29.2
  Bottom Layer w0.254: XDS1.13 42.95,59.93 U1.15@42.95,54.875
TS_D7: U1.14 XDS1.14 | length 30
  Bottom Layer w0.254: XDS1.14 42.3,58.04 U1.14@42.3,54.875
TS_TR: U1.2 U2.27
U6_Vcc: R13.1 R16.2 U6.3 | length 6.5
  Top Layer w0.254: R13.1 33.2,4.5 34,4.5 ; R16.2 34,4.5 ; U6.3 34,6.6 34,4.5
Vbat: PS1.1 U7.3 | length 17.5
  Top Layer w0.254: PS1.1 82.7,65.6 82.7,59.788 81.535,58.623 80.723,58.623 U7.3
VPIC0: C8.1 U2.40 | length 2
  Top Layer w0.254: U2.40 C8.1
VPIC1: C10.2 U2.28 | length 1.7
  Top Layer w0.254: U2.28 C10.2
VPIC2: C12.1 U2.17 | length 1.6
  Top Layer w0.254: C12.1 U2.17
X1: C1.2 U7.1 Y1.1 | length 7.8
  Top Layer w0.254: U7.1 83,57.6 84.6,56 Y1.1 86,55.9 C1.2
X2: C2.2 U7.2 Y1.2 | length 7.3
  Top Layer w0.254: U7.2@80.723,58.123 U7.2 83.1,58.1 83.6,58.6 85.8,58.6 Y1.2 86,58.4 C2.2
pads on no net: P1.1 P1.3 P1.4 P1.5 P1.7 P1.9 P1.11 P1.12 P1.13 P1.14 P1.15 P1.16 P1.17 P1.18 P1.19 P1.20 P1.21 P1.22 P1.23 P1.24 P1.25 P1.26 P1.27 P1.28 P1.29 P1.30 P1.31 P1.32 P1.33 P1.34 P1.35 P1.36 P1.37 P1.38 P1.39 P1.40 P3.0 R17.1 R18.1 S1.1 U2.4 U2.5 U2.19 U2.34 U4.6 U5.6

## Polygon pours and split planes (outlines as drawn)
GND on Top Layer "GND_L01_P006" (solid, pour order 6): 64.7,39.8 64.6,39.9 64.6,48.7 73.5,48.7 73.6,48.6 73.4,48.4 73.4,39.8
GND on Top Layer "HeatsinkConvert" (solid, pour order 4): 81.9,56.4 82.5,59.1 84.4,60.8 91.6,60.8 94.8,57.6 91.4,54.2 84.2,54.2

## Other copper
Bottom Layer:
  text "String" at 75.1,7.5 h1.52

## Text inside footprints (layer, text, board x,y; h text height)
P1: Top Overlay "39" at 148.342,-1.292 h1.27 r270; Top Overlay "40" at 150.882,-1.292 h1.27 r270; Top Overlay "2" at 150.882,51.54 h1.27 r270; Top Overlay "1" at 148.342,51.54 h1.27 r270
PS1: Top Overlay "+" at 79.4,71.5 h1.52